# Altium PCB vt18_cpu_board.PcbDoc (part 3 of 7)
Units mil, origin at the board's own origin, x right, y up, seen from the top; angles counter-clockwise.
Board outline 2283.46 x 2244.09 mil, 8 copper layers (Top Layer, GND1, Signal Layer 1, POWER1, POWER2, Signal Layer 2, GND2, Bottom Layer), stack 66.304 mil thick; 339 components, 286 nets, 1965 pads, 1047 vias.
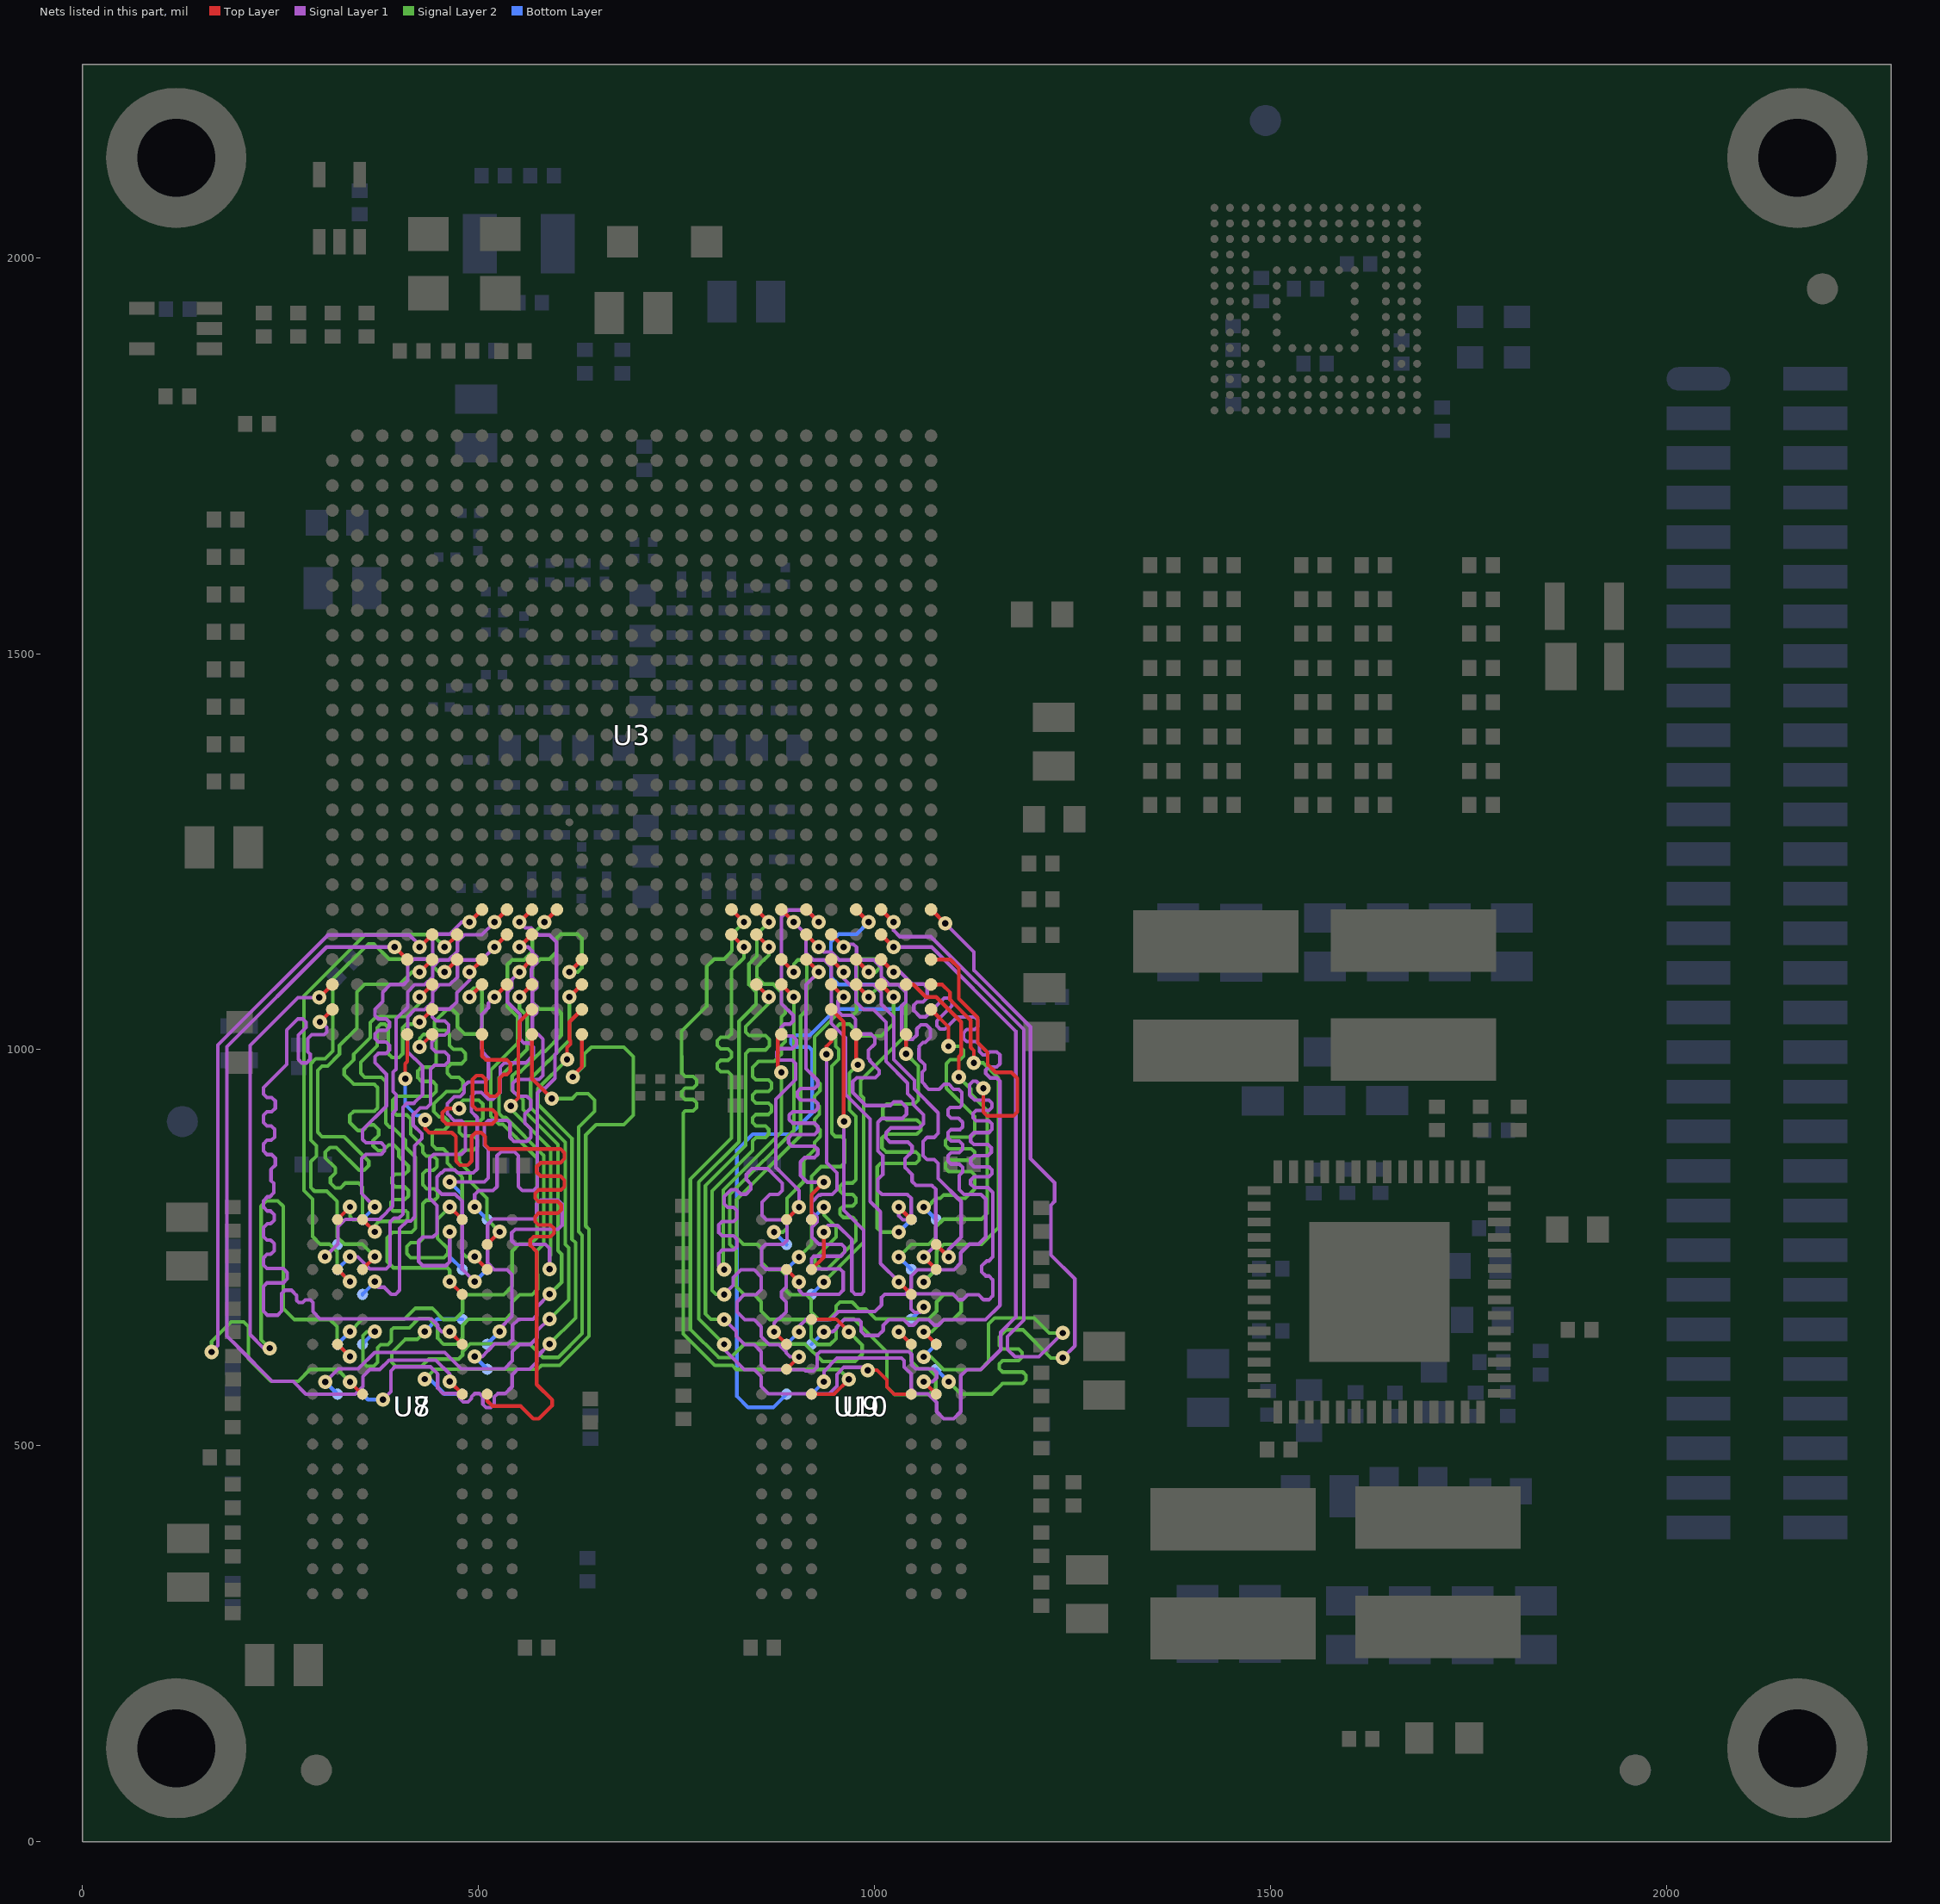
[diagram p9: the nets of this part, all layers, seen from the top]

## Via types
v1: diameter 18, hole 8, Top Layer to Bottom Layer, tented both sides, 718 vias
v2: diameter 20, hole 10, Top Layer to Bottom Layer, tented both sides, 300 vias
v3: diameter 25, hole 15, Top Layer to Bottom Layer, tented both sides, 27 vias
v4: diameter 17.99, hole 7.99, Top Layer to Bottom Layer, tented both sides, 2 vias

## Nets (pads, with @x,y where several pads share a name; then routed paths per layer and width w, separated by ;. In a path a pad name is that pad's centre, name@x,y a point inside that pad or via, vN(x,y) a via of type N, cw(c..) or ccw(c..) an arc to the next point about the centre after c; other vN are vias at no path point) (continued)
DRAM_D3: U3.AA5 U8.H3 | length 1021.2
  Top Layer w4.7: v1(337.73,580.44) 353.08,565.09 U8.H3@353.45,565.1 ; v1(425.66,1129.62) U3.AA5@441.41,1145.37
  Signal Layer 1 w4.5: v1(162.88,618.34) 170.88,626.34 170.88,1005.84 309.93,1144.89 412.83,1144.89 425.66,1132.06 v1(425.66,1129.62)
  Signal Layer 2 w4.5: v1(162.88,618.34) 162.88,631.43 187.79,656.34 203.38,656.34 209.38,650.34 209.38,609.84 237.88,581.34 250.96,581.34 272.37,581.33 287.38,596.34 321.83,596.34 v1(337.73,580.44)
DRAM_D4: U3.AC1 U8.F2 | length 1023.6
  Top Layer w4.7: v1(298.89,1065.84) U3.AC1@315.43,1082.38 ; U8.F2@321.95,628.09 322.14,628.08 v1(337.63,612.58)
  Signal Layer 1 w4.5: v1(236.28,623.19) 228.53,623.19 211.39,640.33 211.39,1005.35 271.88,1065.84 v1(298.89,1065.84)
  Signal Layer 2 w4.5: v1(236.28,623.19) 225.38,634.09 225.38,802.34 232.38,809.34 246.38,809.34 253.38,802.34 253.38,673.34 267.39,659.33 312.45,659.33 321.39,650.4 321.39,628.83 v1(337.63,612.58)
DRAM_D5: U3.AD1 U8.F7 | length 1025.2
  Top Layer w4.7: v1(299.68,1035.14) U3.AD1@315.43,1050.88 ; v1(463.63,644.08) 479.44,628.27 U8.F7@479.43,628.09
  Signal Layer 1 w4.5: v1(299.68,1035.14) 301.36,1035.14 308.38,1028.12 308.38,1022.34 304.93,1018.89 289.43,1018.89 284.43,1013.89 284.43,997.32 287.38,994.37 287.38,987.75 282.97,983.34 276.74,983.34 272.34,987.75 272.34,1018.39 282.15,1028.2 282.15,1034.57 277.83,1038.89 271.96,1038.89 257.83,1024.76 257.83,981.39 228.39,951.94 228.39,944.13 232.89,939.63 238.88,939.63 243.38,935.13 243.38,926.13 238.88,921.63 232.89,921.63 228.39,917.13 228.39,908.13 232.89,903.63 238.38,903.63 242.38,899.63 242.38,889.63 238.38,885.63 232.89,885.63 228.39,881.13 228.39,872.13 232.89,867.63 238.88,867.63 243.38,863.13 243.38,854.13 237.89,848.64 237.89,834.83 241.38,831.34 241.38,819.35 236.37,814.34 233.38,814.34 228.39,809.35 228.39,801.33 233.38,796.34 237.37,796.34 241.89,791.82 241.89,784.84 237.38,780.33 233.39,780.33 228.39,775.33 228.39,764.13 232.89,759.63 237.38,759.63 241.89,755.13 241.89,746.14 237.38,741.63 232.89,741.63 228.39,737.13 228.39,728.13 232.89,723.63 253.38,723.63 258.38,718.63 258.38,710.63 253.38,705.63 232.89,705.63 228.39,701.13 228.39,669.84 233.39,664.84 246.38,664.84 251.38,669.84 251.38,692.34 255.38,696.34 263.8,696.34 270.38,689.76 270.38,683.34 273.02,680.7 278.02,680.7 281.34,684.02 287.7,684.02 290.89,680.83 290.89,669.26 299.82,660.33 440.39,660.33 448.38,652.34 448.38,649.08 453.38,644.08 v1(463.63,644.08)
DRAM_D6: U3.AB4 U8.H7 | length 1027.5
  Top Layer w4.7: v1(394.13,1129.64) U3.AB4@409.9,1113.88 ; v1(463.63,581.09) 479.44,565.28 U8.H7@479.43,565.1
  Signal Layer 1 w4.5: v1(394.13,1129.64) 308.08,1129.64 182.38,1003.94 182.38,638.41 196.13,624.66 196.13,624.59 239.38,581.34 250.96,581.34 263.6,581.33 265.83,581.34 281.98,565.19 344.05,565.19 353.88,575.02 353.88,587.41 362.81,596.34 375.19,596.34 386.95,608.09 445.91,608.09 463.63,590.37 v1(463.63,581.09)
DRAM_D7: U3.AE4 U8.H8 | length 1025.7
  Top Layer w4.7: v1(407.38,963.19) 407.38,982.39 409.92,984.92 U3.AE4@409.92,1019.39 ; v1(432.63,911.34) 432.63,900.34 437.63,895.34 466.38,895.34 471.38,890.34 471.38,859.34 476.38,854.34 486.38,854.34 491.38,859.34 491.38,890.34 496.38,895.34 503.38,895.34 508.38,890.34 508.38,879.79 513.38,874.79 603.38,874.79 608.38,869.79 608.38,862.34 603.38,857.34 578.38,857.34 573.38,852.34 573.38,845.34 578.38,840.34 603.38,840.34 608.38,835.34 608.38,827.22 604.07,822.91 575.69,822.91 571.38,818.61 571.38,812.52 575.69,808.21 600.07,808.21 604.38,803.91 604.38,797.82 600.07,793.51 575.69,793.51 571.38,789.21 571.38,783.12 575.69,778.81 591.07,778.81 595.38,774.51 595.38,768.42 591.07,764.11 569.69,764.11 565.38,759.81 565.38,753.02 573.47,744.93 573.47,577.25 592.84,557.88 592.84,550.8 576.11,534.08 569.04,534.08 553.08,550.04 517.64,550.04 510.94,556.74 U8.H8@510.93,565.1
  Bottom Layer w4.7: v1(407.38,963.19) 407.38,930.99 421.58,916.79 427.18,916.79 v1(432.63,911.34)
DRAM_D8: U3.AD5 U8.D7 | length 648.9
  Top Layer w4.7: v1(425.66,1035.14) U3.AD5@441.41,1050.88 ; v1(463.63,707.07) 479.44,691.26 U8.D7@479.43,691.08
  Signal Layer 2 w4.5: v1(425.66,1035.14) 422.87,1032.34 408.76,1032.34 404.26,1027.84 404.26,994.84 399.76,990.34 390.76,990.34 386.26,994.84 386.26,1027.84 381.76,1032.34 376.38,1032.34 371.92,1027.88 371.92,1004.88 351.38,984.34 351.38,970.34 356.38,965.34 377.3,965.34 382.88,959.76 382.88,907.32 387.88,902.32 391.4,902.32 407.87,885.85 407.87,876.85 420.39,864.33 420.39,774.59 415.39,769.59 391.39,769.59 384.39,762.59 384.39,732.59 392.39,724.59 460.38,724.59 463.63,721.34 v1(463.63,707.07)
DRAM_D9: U3.AE5 U8.A7 | length 653.8
  Top Layer w4.7: v1(425.66,1003.64) U3.AE5@441.41,1019.39 ; v1(463.63,801.56) 479.44,785.75 U8.A7@479.43,785.57
  Signal Layer 2 w4.5: v1(425.66,1003.64) 425.66,1014.34 430.66,1019.34 441.37,1019.34 446.38,1014.33 446.38,982.48 441.88,977.98 427.88,977.98 423.38,973.48 423.38,964.48 427.88,959.98 441.88,959.98 446.38,955.48 446.38,947.34 440.38,941.34 396.38,941.34 391.38,936.34 391.38,922.65 396.38,917.65 409.39,917.65 414.39,912.65 414.39,893.26 429.39,878.26 429.39,870.32 433.89,865.82 442.88,865.82 447.38,861.32 447.38,852.32 442.88,847.82 433.89,847.82 429.39,843.32 429.39,829.59 434.47,824.51 444.14,824.51 448.39,820.26 448.39,814.26 444.14,810.01 433.81,810.01 429.39,805.59 429.39,761.34 424.39,756.34 414.38,756.34 409.38,751.34 409.38,742.59 414.38,737.59 456.39,737.59 461.39,742.59 461.39,748.59 447.89,762.09 447.89,785.82 v1(463.63,801.56)
DRAM_D10: U3.AA6 U8.C2 | length 652.7
  Top Layer w4.7: U8.C2@321.95,722.58 322.14,722.57 v1(337.63,707.07) ; v1(457.16,1129.62) 472.91,1144.87 U3.AA6@472.91,1145.37
  Signal Layer 2 w4.5: 299.82,754.81 290.89,763.75 290.48,764.17 290.48,811.24 279.39,822.33 279.39,1067.91 356.82,1145.34 441.44,1145.34 v1(457.16,1129.62) ; 299.83,754.81 300.06,754.59 311.7,754.59 321.4,744.89 321.4,723.3 v1(337.63,707.07)
DRAM_D11: U3.AE7 U8.B8 | length 653.7
  Top Layer w4.7: v1(475.67,925.64) 459.38,925.64 454.38,920.64 454.38,911.34 459.38,906.34 517.38,906.34 522.38,911.34 522.38,919.34 517.38,924.34 497.38,924.34 492.38,929.34 492.38,962.42 497.34,967.39 504.37,967.39 509.33,962.42 509.33,946.34 514.33,941.34 521.76,941.34 526.46,946.04 526.46,963.84 531.16,968.54 535.68,968.54 540.38,973.24 540.38,982.64 535.68,987.34 509.1,987.34 504.4,992.04 U3.AE7@504.4,1019.39 ; U8.B8@510.93,754.07 510.94,754.38 v1(526.62,770.06)
  Signal Layer 2 w4.5: v1(475.67,925.64) 475.67,931.34 480.67,936.34 500.38,936.34 505.38,931.34 505.38,913.34 500.38,908.34 480.67,908.34 475.67,903.34 475.67,895.68 480.17,891.18 493.88,891.18 498.38,886.68 498.38,877.68 493.88,873.18 480.17,873.18 475.67,868.68 475.67,858.05 489.39,844.33 489.39,833.59 510.39,812.59 510.39,786.3 v1(526.62,770.06)
DRAM_D12: U3.AB5 U8.A2 | length 656.1
  Top Layer w4.7: U8.A2@321.95,785.57 321.96,785.89 v1(337.63,801.56) ; v1(425.66,1098.13) U3.AB5@441.41,1113.88
  Signal Layer 2 w4.5: v1(337.63,801.56) 337.65,789.33 341.67,785.31 348.38,785.31 353.38,790.31 353.38,826.72 348.38,831.72 331.9,831.72 325.63,825.45 319.27,825.45 312.9,831.82 312.9,838.18 319.17,844.45 319.17,850.81 306.39,863.59 306.39,870.59 312.39,876.59 320.39,876.59 349.39,847.59 355.39,847.59 361.39,853.59 361.39,859.33 330.38,890.34 302.38,890.34 296.88,895.84 296.88,973.84 302.38,979.34 309.35,979.34 324.42,994.41 324.42,1005.38 346.42,1027.38 346.42,1072.95 355.97,1082.5 400.49,1082.5 416.12,1098.13 v1(425.66,1098.13)
DRAM_D13: U3.AC5 U8.A3 | length 648.4
  Top Layer w4.7: U8.A3@353.45,785.57 353.63,785.56 v1(369.13,770.06) ; v1(425.66,1066.63) U3.AC5@441.41,1082.38
  Signal Layer 2 w4.5: v1(369.13,770.06) 369.13,778.34 374.13,783.34 407.38,783.34 410.38,786.34 410.38,794.34 408.38,796.34 392.38,796.34 389.38,799.34 389.38,807.34 392.88,810.84 406.88,810.84 411.38,815.34 411.38,822.34 406.88,826.84 394.88,826.84 390.38,831.34 390.38,838.34 394.88,842.84 406.88,842.84 411.38,847.34 411.38,853.34 399.37,865.35 399.37,873.35 393.01,879.71 386.64,879.71 379.51,872.58 373.14,872.58 366.78,878.94 366.78,885.3 373.92,892.44 373.92,898.8 367.55,905.17 361.19,905.17 354.05,898.03 347.69,898.03 337.38,908.34 337.38,917.34 342.38,922.34 368.38,922.34 372.38,926.34 372.38,952.34 368.38,956.34 342.38,956.34 330.38,968.34 330.38,975.34 342.38,987.34 342.38,994.34 363.42,1015.38 363.42,1034.38 370.88,1041.84 408.88,1041.84 425.66,1058.62 v1(425.66,1066.63)
DRAM_D14: U3.AB6 U8.C3 | length 649.6
  Top Layer w4.7: U8.C3@353.45,722.58 353.46,722.9 v1(369.13,738.57) ; v1(457.16,1098.13) U3.AB6@472.91,1113.88
  Signal Layer 2 w4.5: 314.93,997.32 306,988.39 294.43,988.39 288.38,982.34 288.38,885.84 295.33,878.89 295.33,865.84 288.38,858.89 288.38,825.84 292.83,821.39 308.33,821.39 321.33,808.39 321.33,807.93 321.39,807.88 321.39,763.59 330.39,754.59 331.41,754.59 331.46,754.54 344.1,754.54 344.15,754.59 353.1,754.59 v1(369.13,738.57) ; 314.93,997.35 315.92,998.34 315.92,1088.88 360.93,1133.89 367.83,1133.89 387.35,1114.37 433.35,1114.37 449.59,1098.13 v1(457.16,1098.13)
DRAM_D15: U3.AC7 U8.C8 | length 649.9
  Top Layer w4.7: v1(488.66,1066.63) U3.AC7@504.4,1082.38 ; v1(495.13,738.57) 510.94,722.76 U8.C8@510.93,722.58
  Signal Layer 2 w4.5: v1(488.66,1066.63) 488.66,1072.88 493.66,1077.88 499.98,1077.88 504.38,1073.48 504.38,1024.88 499.38,1019.88 482.34,1019.88 473.38,1028.84 473.38,1044.38 466.92,1050.84 459.84,1050.84 444.41,1035.41 444.41,1028.34 448.4,1024.34 458.38,1024.34 463.38,1019.34 463.38,1005.34 468.38,1000.34 478.38,1000.34 483.38,995.34 483.38,987.34 478.38,982.34 465.38,982.34 460.38,977.34 460.38,970.34 465.38,965.34 475.38,965.34 480.38,960.34 480.38,952.34 475.38,947.34 459.4,947.34 443.38,931.32 443.38,922.16 450.38,915.16 456.45,915.16 461.38,910.23 461.38,903.27 456.45,898.34 446.38,898.34 441.38,893.34 441.38,879.71 446.38,874.71 455.38,874.71 460.38,869.71 460.38,856.84 468.91,848.31 469.95,848.31 478.88,839.38 478.88,838.34 479.39,837.83 479.39,743.57 484.39,738.57 v1(495.13,738.57)
DRAM_D16: U3.AB7 U7.D7 | length 612
  Top Layer w4.7: v1(488.66,1098.13) 504.4,1113.36 U3.AB7@504.4,1113.88
  Signal Layer 1 w4.5: v1(369.13,707.07) 369.13,704.34 373.38,700.09 380.91,700.09 389.66,691.34 395.38,691.34 400.38,696.34 400.38,774.34 409.78,783.74 414.38,783.74 419.38,788.74 419.38,878.87 428.38,887.87 428.38,894.02 417.38,905.02 417.38,917.66 426.31,926.59 434.38,926.59 439.38,931.59 439.38,975.34 444.38,980.34 457.38,980.34 462.38,985.34 462.38,992.34 457.38,997.34 445.91,997.34 440.91,1002.34 440.91,1009.96 449.3,1018.34 457.38,1018.34 462.38,1023.34 462.38,1031.34 457.38,1036.34 446.38,1036.34 441.38,1041.34 441.38,1046.38 446.38,1051.38 463.48,1051.38 472.41,1060.31 472.41,1071.95 488.66,1088.2 v1(488.66,1098.13)
  Bottom Layer w4.7: U7.D7@353.46,691.08 353.46,691.24 353.38,691.32 v1(369.13,707.07)
DRAM_D17: U3.AA8 U7.C8 | length 613.7
  Top Layer w4.7: v1(520.15,1129.62) U3.AA8@535.9,1145.37
  Signal Layer 1 w4.5: v1(337.63,738.57) 347.56,738.57 362.81,723.32 383.38,723.32 388.38,728.32 388.38,782.31 393.38,787.31 399.41,787.31 404.41,792.31 404.41,927.34 409.41,932.34 418.38,932.34 429.38,943.34 429.38,978.72 419.72,988.39 419.34,988.39 410.41,997.32 410.41,1041.46 419.34,1050.39 432,1050.39 441.91,1060.31 441.91,1072.95 450.84,1081.88 463.48,1081.88 473.41,1091.81 473.41,1107.34 479.44,1113.38 503.91,1113.38 v1(520.15,1129.62)
  Bottom Layer w4.7: U7.C8@321.96,722.58 321.96,722.9 v1(337.63,738.57)
DRAM_D18: U3.AB9 U7.C2 | length 615.6
  Top Layer w4.7: v1(551.65,1098.13) 566.92,1113.88 U3.AB9@567.4,1113.88
  Signal Layer 1 w4.5: v1(495.13,707.07) 479.39,722.81 479.39,808.59 470.39,817.59 453.39,817.59 447.39,823.59 447.39,839.34 452.39,844.34 453.35,844.34 457.31,848.31 469.95,848.31 473.92,844.34 493.38,844.34 498.38,849.34 498.38,914.32 490.92,921.78 490.92,941.34 495.92,946.34 503.38,946.34 512.38,937.34 518.38,937.34 527.38,946.34 527.38,978.34 532.38,983.34 559.38,983.34 569.38,993.34 569.38,1003.34 564.38,1008.34 557.38,1008.34 552.38,1013.34 552.38,1044.33 536.4,1060.31 536.4,1072.95 541.78,1078.33 541.78,1088.26 v1(551.65,1098.13)
  Bottom Layer w4.7: v1(495.13,707.07) 510.79,722.73 510.88,722.82 510.94,722.76 U7.C2@510.94,722.58
DRAM_D19: U3.Y9 U7.A2 | length 608.1
  Top Layer w4.7: v1(551.65,1161.12) U3.Y9@567.4,1176.87
  Signal Layer 1 w4.5: v1(495.13,801.56) 495.13,817.33 500.13,822.33 518.38,822.33 523.38,827.33 523.38,866.34 528.38,871.34 545.38,871.34 550.38,866.34 550.38,827.33 555.38,822.33 569.38,822.33 574.38,827.33 574.38,945.34 580.38,951.34 584.01,951.34 596.48,963.81 596.48,993.91 598.39,995.82 598.39,1135.94 589.46,1144.87 575.75,1144.87 566.73,1153.89 558.88,1153.89 v1(551.65,1161.12)
  Bottom Layer w4.7: v1(495.13,801.56) 510.94,785.75 U7.A2@510.94,785.57
DRAM_D20: U3.Y7 U7.A7 | length 614
  Top Layer w4.7: v1(488.66,1161.12) U3.Y7@504.4,1176.87
  Signal Layer 1 w4.5: 359.05,811.64 v1(369.13,801.56) ; 359.05,811.66 352.38,818.32 352.38,862.66 357.64,867.91 377.13,867.91 381.38,872.16 381.38,878.16 377.13,882.41 357.64,882.41 353.39,886.66 353.39,898.75 383.63,928.99 383.63,969.09 369.13,983.59 369.13,991.09 373.38,995.34 383.16,995.34 387.41,999.58 387.41,1005.59 383.16,1009.84 373.38,1009.84 369.13,1014.08 369.13,1020.09 373.38,1024.34 383.16,1024.34 387.41,1028.58 387.41,1034.59 383.16,1038.84 373.38,1038.84 369.13,1043.08 369.13,1051.09 378.92,1060.88 378.92,1072.56 ; 378.93,1072.58 387.86,1081.51 388.7,1082.34 405.41,1082.34 410.41,1087.34 410.41,1106.4 418.38,1114.37 436.91,1114.37 441.91,1119.37 441.91,1138.87 448.91,1145.87 463.48,1145.87 478.73,1161.12 v1(488.66,1161.12)
  Bottom Layer w4.7: U7.A7@353.46,785.57 353.46,785.89 v1(369.13,801.56)
DRAM_D21: U3.Y8 U7.B8 | length 611.5
  Top Layer w4.7: v1(520.15,1161.12) U3.Y8@535.9,1176.87
  Signal Layer 1 w4.5: v1(306.14,738.57) 322.38,754.81 322.38,776.34 331.93,785.89 374.93,785.89 375.35,786.31 375.45,786.31 384.38,795.24 384.38,795.34 391.38,802.34 391.38,919.79 395.91,924.32 395.91,943.56 392.13,947.34 392.13,971.51 395.91,975.29 395.91,1038.97 401.91,1044.97 410.41,1053.49 410.41,1072.95 419.34,1081.88 431.98,1081.88 441.91,1091.81 441.91,1104.45 450.84,1113.38 462.42,1113.38 463.41,1114.37 463.48,1114.37 472.41,1123.3 472.41,1123.37 473.41,1124.37 473.41,1136.37 482.23,1145.19 504.22,1145.19 v1(520.15,1161.12)
  Bottom Layer w4.7: v1(306.14,738.57) 321.79,754.24 321.88,754.32 321.96,754.24 U7.B8@321.96,754.07
DRAM_D22: U3.AC8 U7.C3 | length 615.2
  Top Layer w4.7: v1(520.15,1066.63) U3.AC8@535.9,1082.38
  Signal Layer 1 w4.5: v1(463.63,770.06) 463.63,732.34 458.63,727.34 429.38,727.34 424.38,732.34 424.38,758.35 429.38,763.35 442.38,763.35 447.38,768.35 447.38,803.34 438.39,812.33 438.39,862.99 443.39,867.99 478.38,867.99 483.38,872.99 483.38,905.39 478.38,910.39 469.35,910.39 460.42,919.32 460.42,931.96 469.35,940.89 476.91,940.89 481.91,945.89 481.91,954.34 486.91,959.34 507.41,959.34 512.41,964.34 512.41,989.81 504.9,997.32 504.9,999.83 503.38,1001.35 503.38,1028.29 503.91,1028.82 503.91,1044.49 512.41,1052.99 512.41,1058.88 v1(520.15,1066.63)
  Bottom Layer w4.7: v1(463.63,770.06) 463.63,738.57 479.44,722.76 U7.C3@479.44,722.58
DRAM_D23: U3.AA9 U7.A3 | length 608.9
  Top Layer w4.7: v1(551.65,1129.62) U3.AA9@567.4,1145.37
  Signal Layer 1 w4.5: v1(463.63,833.06) 507.38,833.06 512.38,838.06 512.38,874.36 507.38,879.36 507.38,905.8 512.38,910.8 536.38,910.8 539.63,907.55 539.63,889.34 544.63,884.34 560.88,884.34 565.88,889.34 565.88,899.84 558.38,907.34 558.38,918.84 565.88,926.34 565.88,936.34 560.88,941.34 550.05,941.34 543.38,948.01 543.38,957.34 548.38,962.34 576.38,962.34 581.38,967.34 581.38,1013.34 567.89,1026.83 567.89,1041.46 573.38,1046.95 573.38,1054.34 567.89,1059.83 567.89,1072.95 573.38,1078.44 573.38,1085.26 566.9,1091.74 566.9,1101.97 567.89,1102.96 567.89,1104.45 573.38,1109.94 573.38,1117.33 567.89,1122.82 567.89,1124.62 562.89,1129.62 v1(551.65,1129.62)
  Bottom Layer w4.7: v1(463.63,833.06) 479.38,817.31 479.38,785.81 479.44,785.75 U7.A3@479.44,785.57
DRAM_D24: U3.AE9 U7.E3 | length 851.1
  Top Layer w4.7: U3.AE9@567.4,1019.39 567.4,963.42 v1(592.53,938.29)
  Signal Layer 2 w4.5: v1(432.14,644.08) 422.38,634.34 407.38,634.34 390.38,617.34 390.38,605.34 395.38,600.34 428.14,600.34 437.14,609.34 474.88,609.34 479.88,614.34 479.88,618.9 489.57,628.59 564.39,628.59 581.39,611.59 600.6,611.59 630.88,641.87 630.88,765.84 626.38,770.34 626.38,902.34 646.38,922.34 646.38,936.34 638.38,944.34 624.38,944.34 618.33,938.29 v1(592.53,938.29)
  Bottom Layer w4.7: v1(432.14,644.08) 447.88,659.83 475.38,659.83 475.63,659.58 U7.E3@479.44,659.59
DRAM_D25: U3.Y10 U7.F8 | length 850.4
  Top Layer w4.7: v1(583.14,1161.12) U3.Y10@598.89,1176.87
  Signal Layer 2 w4.5: v1(337.63,644.08) 353.14,659.59 406.39,659.59 420.39,673.59 441.39,673.59 455.65,659.33 469.95,659.33 470.04,659.24 479.88,669.08 479.88,685.08 485.62,690.83 531.95,690.83 542.39,701.27 542.39,745.59 551.39,754.59 565.39,754.59 573.89,763.09 573.89,862.91 546.67,890.12 530.7,906.09 525.65,906.09 515.38,916.36 515.38,974.34 549.38,1008.34 549.38,1041.34 536.4,1054.32 536.4,1107.34 542.43,1113.38 557.42,1113.38 567.89,1123.85 567.89,1145.1 583.14,1160.35 v1(583.14,1161.12)
  Bottom Layer w4.7: U7.F8@321.96,628.09 321.96,628.25 321.88,628.33 v1(337.63,644.08)
DRAM_D26: U3.AE11 U7.H3 | length 848.6
  Top Layer w4.7: v1(619.03,965.69) 619.03,966.99 630.39,978.35 U3.AE11@630.39,1019.39
  Signal Layer 2 w4.5: v1(432.14,584.09) 444.64,596.59 574.39,596.59 579.39,601.59 602.63,601.59 639.38,638.34 639.38,773.34 635.38,777.34 635.38,892.34 648.38,905.34 683.38,905.34 695.38,917.34 695.38,991.34 683.38,1003.34 642.38,1003.34 633.38,994.34 633.38,980.04 v1(619.03,965.69)
  Bottom Layer w4.7: v1(432.14,584.09) 438.63,584.09 457.38,565.34 468.38,565.34 468.63,565.09 U7.H3@479.44,565.1
DRAM_D27: U3.AB11 U7.G2 | length 842.8
  Top Layer w4.7: v1(614.64,1098.13) U3.AB11@630.39,1113.88
  Signal Layer 1 w4.5: v1(495.13,612.58) 504.38,612.58 511.89,620.09 520.41,628.59 537.87,628.59 542.87,633.59 542.87,652.04 550.16,659.33 552.13,659.33 552.39,659.59 568.63,659.59 573.39,664.35 573.39,675.09 v1(589.62,691.32)
  Signal Layer 2 w4.5: v1(589.62,691.32) 604.87,706.57 604.87,741.85 600.38,746.34 600.38,880.17 556.18,924.37 556.18,936.75 551.18,941.75 549.64,941.75 542.38,949.01 542.38,966.6 547.38,971.6 552.67,971.6 569.88,988.81 579.06,998.02 584.06,998.02 604.38,1018.34 604.38,1046.34 599.38,1051.34 576.86,1051.34 567.89,1060.31 567.89,1104.45 577.81,1114.37 589.46,1114.37 598.39,1123.3 598.39,1140.87 603.39,1145.87 625.38,1145.87 630.38,1140.87 630.38,1103.13 625.38,1098.13 v1(614.64,1098.13)
  Bottom Layer w4.7: v1(495.13,612.58) 510.94,596.77 U7.G2@510.94,596.59
DRAM_D28: U3.AC9 U7.F7 | length 847
  Top Layer w4.7: v1(551.65,1066.63) U3.AC9@567.4,1082.38
  Signal Layer 2 w4.5: v1(369.13,644.08) 358.88,644.08 353.9,639.1 353.9,605.34 358.9,600.34 367.39,600.34 372.39,605.34 372.39,623.59 376.39,627.59 385.39,627.59 389.97,632.17 389.97,646.34 392.45,648.83 412.63,648.83 424.39,660.59 437.39,660.59 448.38,649.6 448.38,635.6 455.89,628.09 471.89,628.09 479.88,636.08 479.88,652.08 487.39,659.59 534.39,659.59 542.39,667.59 542.39,681.41 551.8,690.83 567.62,690.83 574.39,697.59 574.39,716.48 ; v1(551.65,1066.63) 551.65,1052.33 561.38,1042.6 561.38,1000.34 525.68,964.64 525.68,919.76 525.86,919.59 530.86,914.59 534.24,914.59 582.39,866.44 582.39,754.59 574.37,746.57 574.37,716.5
  Bottom Layer w4.7: U7.F7@353.46,628.09 353.46,628.25 353.38,628.33 v1(369.13,644.08)
DRAM_D29: U3.AD9 U7.F2 | length 848
  Top Layer w4.7: v1(540.93,928.89) 540.93,929.89 550.25,939.21 550.25,1011.46 551.65,1012.86 551.65,1035.41 567.12,1050.88 U3.AD9@567.4,1050.88
  Signal Layer 1 w4.5: 511.37,732.25 511.37,744.89 ; 511.37,763.75 511.37,776.38 ; 511.38,732.24 511.38,730.66 519.7,722.34 536.12,722.34 542.14,716.32 542.14,663.34 526.62,647.83 v1(526.62,644.08) ; 511.38,744.89 511.38,763.74 ; 511.38,776.39 511.38,779.34 518.35,786.31 570.38,786.31 573.37,789.3 573.37,805.34 578.37,810.34 600.38,810.34 605.38,805.34 605.38,778.34 600.38,773.34 546.38,773.34 541.87,768.83 541.87,758.85 546.38,754.34 584.62,754.34 589.62,749.34 v1(589.62,722.82)
  Signal Layer 2 w4.5: v1(540.93,928.89) 540.93,924.79 590.89,874.83 590.89,740.35 589.62,739.08 v1(589.62,722.82)
  Bottom Layer w4.7: U7.F2@510.94,628.09 510.94,628.27 510.88,628.33 v1(526.62,644.08)
DRAM_D30: U3.AD11 U7.H7 | length 850.2
  Top Layer w4.7: v1(611.73,987.59) 611.73,1002.79 616.04,1007.1 616.04,1011.46 614.64,1012.86 614.64,1035.14 U3.AD11@630.39,1050.88
  Signal Layer 1 w4.5: v1(379.38,558.34) 389.38,568.34 389.38,594.59 394.38,599.59 439.18,599.59 448.38,590.39 448.38,572.58 455.13,565.84 472.12,565.84 476.37,561.59 476.37,559.59 480.62,555.34 486.62,555.34 490.87,559.59 490.87,561.59 495.12,565.84 501.12,565.84 505.37,561.59 505.37,552.59 509.62,548.34 515.62,548.34 519.87,552.59 519.87,561.59 524.12,565.84 533.62,565.84 542.37,574.59 542.37,589.59 549.37,596.59 564.37,596.59 573.25,605.47 573.25,606.14 573.37,606.27 573.37,612.1 v1(589.6,628.33)
  Signal Layer 2 w4.5: v1(589.6,628.33) 589.6,628.56 622.38,661.34 622.38,756.34 617.88,760.84 617.88,887.84 574.98,930.74 574.98,950.84 v1(611.73,987.59)
  Bottom Layer w4.7: U7.H7@353.46,565.1 360.21,558.34 v1(379.38,558.34)
DRAM_D31: U3.AC11 U7.H8 | length 846.8
  Top Layer w4.7: v1(614.64,1066.63) U3.AC11@630.39,1082.38
  Signal Layer 1 w4.5: v1(306.28,580.74) 306.78,580.74 323.13,597.09 348.13,597.09 368.93,617.89 457.28,617.89 477.84,597.33 532.94,597.33 542.85,607.25 542.85,618.9 551.79,627.83 565.61,627.83 574.37,636.59 574.37,645.33 588.87,659.83 v1(589.6,659.83)
  Signal Layer 2 w4.5: v1(589.6,659.83) 613.88,684.11 613.88,749.84 609.38,754.34 609.38,883.2 565.83,926.75 565.83,963.84 587.58,985.59 588.16,985.59 614.64,1012.07 v1(614.64,1066.63)
  Bottom Layer w4.7: v1(306.28,580.74) 317.43,569.59 U7.H8@321.96,565.1
DRAM_D32: U3.AA17 U10.E3 | length 925.7
  Top Layer w4.7: U3.AA17@819.36,1145.37 v1(835.11,1129.62) ; U10.E3@920.38,659.59 951.88,659.58 v1(967.63,643.83)
  Signal Layer 2 w4.5: v1(835.11,1129.62) 835.11,1116.07 819.38,1100.34 819.38,1019.88 815.13,1015.64 805.63,1015.64 801.38,1011.39 801.38,1005.38 805.63,1001.14 815.13,1001.14 819.38,996.89 819.38,990.88 815.13,986.64 805.63,986.64 801.38,982.39 801.38,976.38 805.63,972.14 815.13,972.14 819.38,967.89 819.38,888.34 767.38,836.34 767.38,647.34 803.38,611.34 818.38,611.34 835.38,628.34 912.38,628.34 934.38,606.34 975.38,606.34 984.38,615.34 984.38,627.08 v1(967.63,643.83)
DRAM_D33: U3.AA18 U10.G2 | length 930.2
  Top Layer w4.7: U3.AA18@850.86,1145.37 v1(866.61,1129.62) ; U10.G2@888.88,596.59 v1(904.64,612.33)
  Signal Layer 1 w4.5: v1(810.15,691.07) 821.64,702.56 821.64,712.49 831.22,722.07 847.97,722.07 856.9,713.14 856.9,697.34 850.13,690.57 835.33,690.57 826.4,681.64 826.4,669.01 836.32,659.08 847.97,659.08 856.9,650.15 856.9,637.82 867.14,627.58 879.46,627.58 888.39,618.65 888.39,617.33 893.39,612.33 v1(904.64,612.33)
  Signal Layer 2 w4.5: v1(810.15,691.07) 799.9,691.07 794.9,696.07 794.9,821.86 845.88,872.84 845.88,884.98 850.13,889.23 862.13,889.23 866.38,893.48 866.38,899.48 862.13,903.73 850.13,903.73 845.88,907.98 845.88,913.98 850.13,918.23 866.13,918.23 869.86,921.95 869.86,929.01 866.13,932.73 850.13,932.73 845.88,936.98 845.88,942.98 850.13,947.23 866.13,947.23 869.86,950.95 869.86,958.01 866.13,961.73 850.13,961.73 845.88,965.98 845.88,977.84 853.38,985.34 873.38,985.34 882.38,994.34 882.38,1005.18 887.38,1010.18 887.38,1023.18 882.38,1028.18 882.38,1041.18 887.38,1046.18 887.38,1053.34 882.38,1058.34 882.38,1072.43 871.93,1082.88 860.29,1082.88 851.36,1091.81 851.36,1104.45 860.29,1113.38 860.42,1113.38 866.61,1119.57 v1(866.61,1129.62)
DRAM_D34: U3.AC18 U10.H8 | length 925.1
  Top Layer w4.7: U3.AC18@850.86,1082.38 v1(866.61,1066.63) ; v1(1062.12,580.84) U10.H8@1077.86,565.1
  Signal Layer 1 w4.5: v1(810.15,659.58) 825.38,644.35 825.38,638.34 836.14,627.58 847.97,627.58 856.9,618.65 856.9,601.84 862.66,596.09 910.96,596.09 912.7,594.34 922.64,594.34 927.64,599.34 927.64,615.34 931.38,619.08 1043.13,619.08 1046.87,615.34 1046.87,602.34 1052.13,597.08 1073.63,597.08 1078.37,592.34 1078.37,585.84 1073.37,580.84 v1(1062.12,580.84)
  Signal Layer 2 w4.5: v1(810.15,659.58) 793.38,659.58 786.4,666.55 786.4,828.36 837.38,879.34 837.38,995.23 841.88,999.73 862.38,999.73 867.38,1004.73 867.38,1012.73 862.38,1017.73 841.88,1017.73 837.38,1022.23 837.38,1029.34 866.61,1058.57 v1(866.61,1066.63)
DRAM_D35: U3.AE19 U10.F2 | length 927.9
  Top Layer w4.7: v1(873.14,643.83) U10.F2@888.88,628.09 ; v1(882.36,971.32) 877.83,975.84 877.83,1014.86 U3.AE19@882.36,1019.39
  Signal Layer 1 w4.5: v1(810.15,722.57) 807.38,722.57 803.38,726.57 803.38,743.03 807.38,747.03 821.88,747.03 826.38,751.53 826.38,760.53 821.88,765.03 807.38,765.03 803.38,769.03 803.38,779.03 807.38,783.03 821.88,783.03 826.38,787.53 826.38,796.53 821.88,801.03 814.65,801.03 810.15,805.53 810.15,814.56 819.05,823.46 825.38,823.46 831.26,817.58 837.63,817.58 843.99,823.95 843.99,830.31 838.11,836.19 838.11,842.52 845.43,849.84 864.86,849.84 883.39,831.3 883.39,822.34 878.39,817.34 867.61,817.34 857.89,807.63 857.89,790.55 863.38,785.06 884.38,785.06 889.38,780.06 889.38,759.34 884.38,754.34 862.38,754.34 857.38,749.34 857.38,728.07 862.38,723.07 883.39,723.07 888.39,718.07 888.39,700.5 882.38,694.49 882.38,687.66 888.39,681.64 888.39,669.01 879.46,660.07 878.14,660.07 873.14,655.07 v1(873.14,643.83)
  Signal Layer 2 w4.5: v1(810.15,722.57) 808.88,723.84 808.88,822.84 882.36,896.32 v1(882.36,971.32)
DRAM_D36: U3.Y17 U10.H3 | length 924.5
  Top Layer w4.7: U3.Y17@819.36,1176.87 v1(835.11,1161.12) ; U10.H3@920.38,565.1 948.88,565.09 v1(967.63,583.84)
  Signal Layer 2 w4.5: 809.37,1114.34 797.38,1114.34 788.04,1105 788.04,1055 756.38,1023.34 756.38,992.32 756.63,992.07 756.63,970.4 760.88,966.15 771.13,966.15 775.38,961.9 775.38,955.9 771.13,951.65 760.88,951.65 756.63,947.4 756.63,941.4 760.88,937.15 771.13,937.15 775.38,932.9 775.38,926.9 771.13,922.65 760.88,922.65 758.38,920.15 758.38,641.34 798.38,601.34 820.38,601.34 825.38,596.34 955.13,596.34 v1(967.63,583.84) ; 809.4,1114.37 809.94,1114.37 818.87,1123.3 818.87,1123.83 819.86,1124.82 819.86,1145.87 v1(835.11,1161.12)
DRAM_D37: U3.Y18 U10.H7 | length 927.5
  Top Layer w4.5: v1(991.38,595.33) 1003.09,595.33 1015.43,583 1015.43,574.42
  Top Layer w4.7: U3.Y18@850.86,1176.87 v1(866.61,1161.12) ; 1015.59,574.27 1024.76,565.1 U10.H7@1046.36,565.1
  Signal Layer 1 w4.5: v1(810.15,628.08) 810.15,621.57 835.63,596.09 847.97,596.09 856.9,587.15 856.9,574.82 866.13,565.59 942.63,565.59 952.38,575.34 952.38,590.15 961.31,599.09 987.63,599.09 v1(991.38,595.33)
  Signal Layer 2 w4.5: v1(810.15,628.08) 777.9,660.33 777.9,832.86 828.88,883.84 828.88,1035.86 850.38,1057.36 850.38,1071.52 ; 841.38,1081.88 841.38,1108.34 851.36,1118.32 851.36,1135.94 ; 841.43,1081.88 850.36,1072.95 850.36,1071.54 ; 851.38,1135.96 851.38,1145.89 v1(866.61,1161.12)
DRAM_D38: U3.AB19 U10.F8 | length 930.4
  Top Layer w4.7: U3.AB19@882.36,1113.88 v1(898.1,1098.13) ; v1(1062.12,643.83) U10.F8@1077.86,628.09
  Signal Layer 2 w4.5: v1(898.1,1098.13) 898.1,1108.34 903.1,1113.34 909.38,1113.34 914.38,1108.34 914.38,1104.48 914.35,1104.44 914.35,1091.81 ; 914.35,1060.31 914.35,1072.95 ; 914.38,1060.28 914.38,1050.34 906.6,1042.56 906.6,891.56 825.88,810.84 825.88,762.84 834.38,754.34 852.38,754.34 857.38,749.34 857.38,731.34 866.65,722.07 881.38,722.07 888.39,715.06 888.39,695.57 893.39,690.57 914.15,690.57 919.89,684.83 919.89,668.83 929.64,659.08 941.46,659.08 951.39,669.01 951.39,676.34 956.39,681.34 971.86,681.34 980.36,672.84 988.88,672.84 1001.65,660.07 1068.43,660.07 1078.37,670.01 1078.37,681.64 1087.3,690.57 1099.93,690.57 1109.38,681.13 1109.38,669.52 1098.94,659.08 1087.3,659.08 1072.05,643.83 v1(1062.12,643.83) ; 914.38,1072.98 914.38,1091.78
DRAM_D39: U3.AC19 U10.F7 | length 933.3
  Top Layer w4.7: U3.AC19@882.36,1082.38 v1(898.1,1066.63) ; v1(1030.62,643.83) U10.F7@1046.36,628.09
  Signal Layer 2 w4.5: 850.47,850.43 817.38,817.34 817.38,754.34 825.4,746.32 825.4,701.02 835.84,690.57 847.97,690.57 856.9,681.64 856.9,670 867.55,659.34 ; 850.49,850.43 870.88,870.82 898.1,898.06 v1(898.1,1066.63) ; 867.59,659.38 867.62,659.34 912.38,659.34 919.89,651.83 919.89,635.83 927.88,627.84 943.88,627.84 951.39,635.35 951.39,649.35 962.38,660.34 973.58,660.34 1015.44,618.48 1015.44,587 1015.55,586.89 1015.55,574.45 1025.4,564.59 1068.63,564.59 1077.38,573.34 1077.38,588.14 1068.44,597.08 1055.8,597.08 1045.87,607.01 1045.87,628.58 v1(1030.62,643.83)
DRAM_D40: U3.Y19 U10.D7 | length 561.9
  Top Layer w4.7: U3.Y19@882.36,1176.87 v1(898.1,1161.12) ; v1(1030.62,706.82) U10.D7@1046.36,691.08
  Signal Layer 1 w4.5: v1(898.1,1161.12) 913.38,1145.84 913.38,1122.34 922.34,1113.38 936.34,1113.38 945.38,1104.34 945.38,1033.34 963.38,1015.34 963.38,943.34 994.38,912.34 994.38,808.34 1007.38,795.34 1007.38,730.06 v1(1030.62,706.82)
DRAM_D41: U3.AB20 U10.A3 | length 563.5
  Top Layer w4.7: U3.AB20@913.85,1113.88 v1(929.6,1098.13) ; U10.A3@920.38,785.57 920.39,817.06 v1(936.14,832.8)
  Signal Layer 1 w4.5: v1(929.6,1098.13) 913.38,1081.91 913.38,976.11 928.38,961.11 928.38,955.11 924.13,950.86 906.6,950.86 902.35,946.61 902.35,940.61 906.6,936.36 924.13,936.36 928.38,932.11 928.38,926.11 924.13,921.86 896.63,921.86 892.38,917.61 892.38,911.61 896.63,907.36 924.13,907.36 928.38,903.11 928.38,897.11 924.13,892.86 895.63,892.86 891.38,888.61 891.38,882.61 895.63,878.36 924.13,878.36 928.38,874.11 928.38,868.11 924.13,863.86 911.9,863.86 906.38,858.34 906.38,841.34 914.92,832.8 v1(936.14,832.8)
DRAM_D42: U3.AB21 U10.C8 | length 559.1
  Top Layer w4.7: U3.AB21@945.35,1113.88 v1(961.1,1098.13) ; v1(1062.12,738.32) U10.C8@1077.86,722.58
  Signal Layer 1 w4.5: v1(961.1,1098.13) 961.1,1089.62 976.38,1074.34 976.38,1060.34 986.33,1050.39 998.91,1050.39 1014.38,1034.92 1014.38,985.33 1041.88,957.83 1041.88,944.34 1048.88,937.34 1048.88,930.84 1061.7,918.02 1061.7,906.66 1056.38,901.34 1020.38,901.34 1014.38,895.34 1014.38,888.34 1019.38,883.34 1042.38,883.34 1047.38,878.34 1047.38,871.34 1038.38,862.34 1038.38,851.34 1047.38,842.34 1047.38,833.84 1052.38,828.84 1072.38,828.84 1077.38,823.84 1077.38,753.58 v1(1062.12,738.32)
DRAM_D43: U3.AD21 U10.C3 | length 558.5
  Top Layer w4.7: U10.C3@920.38,722.58 936.14,738.32 v1(936.14,769.81) ; U3.AD21@945.35,1050.88 961.1,1035.14 961.1,909.62 v1(961.38,909.34)
  Signal Layer 1 w4.5: v1(936.14,769.81) 936.14,773.34 941.14,778.34 953.38,778.34 971.38,760.34 971.38,695.34 975.38,691.34 983.38,691.34 986.38,694.34 986.38,772.34 961.38,797.34 v1(961.38,909.34)
DRAM_D44: U3.Y20 U10.A2 | length 560.1
  Top Layer w4.7: U10.A2@888.88,785.57 v1(904.64,801.31) ; U3.Y20@913.85,1176.87 v1(929.6,1161.12)
  Signal Layer 1 w4.5: v1(904.64,801.31) 904.64,822.08 875.38,851.34 875.38,937.34 900.38,962.34 900.38,982.57 896.13,986.81 880.63,986.81 876.38,991.06 876.38,997.07 880.63,1001.31 896.13,1001.31 901.38,1006.56 901.38,1012.34 896.38,1017.34 885.38,1017.34 882.06,1020.66 882.06,1028.02 886.38,1032.34 893.38,1032.34 897.38,1036.34 897.38,1043.34 882.38,1058.34 882.38,1167.67 891.08,1176.37 914.35,1176.37 v1(929.6,1161.12)
DRAM_D45: U3.AA20 U10.B8 | length 566.3
  Top Layer w4.7: U3.AA20@913.85,1145.37 v1(929.6,1129.62) ; U10.B8@1077.86,754.07 v1(1093.62,738.32)
  Signal Layer 1 w4.5: v1(929.6,1129.62) 935.88,1123.34 945.38,1123.34 955.34,1113.38 971.35,1113.38 976.38,1108.35 976.38,1090.34 984.84,1081.88 998.91,1081.88 1008.38,1072.41 1008.38,1057.34 1024.38,1041.34 1024.38,987.36 1050.38,961.36 1050.38,950.34 1080.38,920.34 1080.38,894.34 1075.38,889.34 1066.38,889.34 1061.38,884.34 1061.38,866.34 1066.38,861.34 1075.38,861.34 1080.38,856.34 1080.38,837.34 1109.38,808.34 1109.38,763.34 1093.62,747.58 v1(1093.62,738.32)
DRAM_D46: U3.AE21 U10.C2 | length 557.6
  Top Layer w4.7: U10.C2@888.88,722.58 v1(904.64,706.82) ; v1(939.35,994.34) 939.35,1004.34 945.35,1010.34 U3.AE21@945.35,1019.39
  Signal Layer 1 w4.5: v1(904.64,706.82) 904.64,696.34 909.64,691.34 955.38,691.34 960.38,696.34 960.38,719.34 956.38,723.34 924.38,723.34 920.38,727.34 920.38,736.34 923.38,739.34 957.38,739.34 962.38,744.34 962.38,750.34 958.38,754.34 932.38,754.34 932.16,754.56 929.82,754.56 920.89,763.49 920.89,776.13 927.38,782.62 927.38,788.5 920.89,794.99 920.89,807.63 929.82,816.56 931.6,816.56 932.38,817.34 946.38,817.34 952.38,823.34 952.38,844.31 939.35,857.34 v1(939.35,994.34)
DRAM_D47: U3.AC21 U10.A7 | length 559.1
  Top Layer w4.7: U3.AC21@945.35,1082.38 v1(961.1,1066.63) ; v1(1030.62,801.31) U10.A7@1046.36,785.57
  Signal Layer 1 w4.5: v1(961.1,1066.63) 958.88,1066.63 953.88,1061.63 953.88,1048.34 958.88,1043.34 970.82,1043.34 975.82,1038.34 975.82,1024.88 980.82,1019.88 995.38,1019.88 1000.38,1014.88 1000.38,1007.34 992.38,999.34 992.38,988.91 994.1,987.19 994.1,985.84 1005.88,974.05 1005.88,969.59 1000.88,964.59 977.38,964.59 972.38,959.59 972.38,946.37 989.16,929.59 1019.93,929.59 1024.37,934.03 1033.67,934.03 1040.38,927.32 1040.38,918.34 1035.38,913.34 1009.38,913.34 1004.38,908.34 1004.38,872.34 1010.38,866.34 1010.38,842.34 1004.38,836.34 1004.38,822.34 1009.38,817.34 1041.38,817.34 1046.38,812.34 1046.38,790.34 1041.38,785.34 1035.62,785.34 1030.62,790.34 v1(1030.62,801.31)
DRAM_D48: U3.AC22 U9.D7 | length 513.6
  Top Layer w4.7: U3.AC22@976.84,1082.38 v1(992.59,1066.63)
  Signal Layer 2 w4.5: v1(936.14,706.82) 986.38,757.06 986.38,938.9 982.26,943.02 982.26,961.22 1039.34,1018.3 1039.34,1072.95 1030.41,1081.88 1007.84,1081.88 v1(992.59,1066.63)
  Bottom Layer w4.7: U9.D7@920.39,691.08 v1(936.14,706.82)
DRAM_D49: U3.AE22 U9.A7 | length 510.2
  Top Layer w4.7: U3.AE22@976.84,1019.39 976.84,982.88 v1(978.84,980.88)
  Signal Layer 2 w4.5: v1(936.14,801.31) 936.14,791.38 951.39,776.13 951.39,763.49 924.68,736.79 924.68,731.04 932.97,722.75 940.04,722.75 976.63,759.34 976.63,784.02 972.38,788.27 960.63,788.27 956.38,792.52 956.38,798.52 960.63,802.77 972.38,802.77 976.63,807.02 976.63,813.02 972.38,817.27 960.63,817.27 956.38,821.52 956.38,827.52 960.63,831.77 972.38,831.77 976.63,836.02 976.63,915.66 968.38,923.91 968.38,970.41 v1(978.84,980.88)
  Bottom Layer w4.7: U9.A7@920.39,785.57 v1(936.14,801.31)
DRAM_D50: U3.AE24 U9.A3 | length 516.6
  Top Layer w4.7: v1(1039.84,994.8) U3.AE24@1039.84,1019.39
  Signal Layer 2 w4.5: v1(1030.62,769.81) 1008.38,769.81 1003.38,774.81 1003.38,852.18 1007.63,856.43 1052.13,856.43 1056.38,860.68 1056.38,866.68 1052.13,870.93 1014.38,870.93 1009.38,875.93 1009.38,888.34 1014.38,893.34 1053.38,893.34 1058.38,898.34 1058.38,906.34 1053.38,911.34 1015.38,911.34 1010.38,916.34 1010.38,926.34 1015.38,931.34 1050.38,931.34 1055.38,936.34 1055.38,979.25 v1(1039.84,994.8)
  Bottom Layer w4.7: v1(1030.62,769.81) U9.A3@1046.37,785.57
DRAM_D51: U3.AC24 U9.C3 | length 511.4
  Top Layer w4.7: U3.AC24@1039.84,1082.38 1049.06,1082.38 1064.81,1066.63 1077.86,1066.63 1109.38,1035.11 1109.38,994.34 1106.38,991.34 v1(1106.38,965.34)
  Signal Layer 2 w4.5: v1(1030.62,738.32) 1046.65,754.34 1068.22,754.34 1077.38,763.5 1077.38,776.34 1087.1,786.06 1135.1,786.06 1142.38,793.34 1142.38,923.34 1121.38,944.34 1121.38,950.34 v1(1106.38,965.34)
  Bottom Layer w4.7: v1(1030.62,738.32) U9.C3@1046.37,722.58
DRAM_D52: U3.AB22 U9.B8 | length 518.5
  Top Layer w4.7: U3.AB22@976.84,1113.88 v1(992.59,1098.13)
  Signal Layer 2 w4.5: v1(873.14,769.81) 884.38,769.81 889.38,774.81 889.38,812.34 910.38,833.34 910.38,860.34 924.1,874.06 924.1,883.17 931.38,890.45 931.38,898.88 924.1,906.16 924.1,912.17 930.38,918.45 930.38,928.88 924.1,935.16 924.1,941.17 931.13,948.2 931.13,957.14 928.35,959.92 924.1,964.16 924.1,1016.06 951.38,1043.34 972.34,1043.34 977.34,1048.34 977.34,1109.37 982.34,1114.37 1001.38,1114.37 1006.38,1109.37 1006.38,1103.13 1001.38,1098.13 v1(992.59,1098.13)
  Bottom Layer w4.7: v1(873.14,769.81) U9.B8@888.89,754.07
DRAM_D53: U3.AC23 U9.C8 | length 510.4
  Top Layer w4.7: U3.AC23@1008.34,1082.38 v1(1024.09,1066.63)
  Signal Layer 2 w4.5: v1(904.64,738.32) 920.38,754.06 920.38,840.34 932.38,852.34 957.38,852.34 962.38,857.34 962.38,886.26 958.13,890.5 950.13,890.5 945.88,894.75 945.88,979.3 954.6,988.02 954.6,1000.66 950.88,1004.38 950.88,1027.34 955.88,1032.34 968.38,1032.34 983.38,1017.34 1008.38,1017.34 1024.09,1033.05 v1(1024.09,1066.63)
  Bottom Layer w4.7: U9.C8@888.89,722.58 v1(904.64,738.32)
DRAM_D54: U3.AD25 U9.A2 | length 510.9
  Top Layer w4.7: U3.AD25@1071.33,1050.88 1093.38,1028.84 v1(1093.38,1004.34)
  Signal Layer 2 w4.5: v1(1062.12,801.31) 1062.38,801.57 1067.31,801.57 1072.31,806.57 1072.31,807.34 1077.31,812.34 1083.08,812.34 1087.3,816.56 1099.93,816.56 1104.15,812.34 1114.58,812.34 1126.38,824.14 1126.38,841.85 1122.13,846.09 1093.63,846.09 1089.38,850.34 1089.38,856.35 1093.63,860.59 1122.13,860.59 1126.38,864.84 1126.38,870.85 1122.13,875.09 1093.63,875.09 1089.38,879.34 1089.38,885.35 1093.63,889.59 1122.13,889.59 1126.38,893.84 1126.38,915.59 1090.63,951.34 1090.63,982.34 1095.63,987.34 1107.81,987.34 1112.38,991.91 1112.38,999.34 1107.38,1004.34 v1(1093.38,1004.34)
  Bottom Layer w4.7: v1(1062.12,801.31) U9.A2@1077.87,785.57
DRAM_D55: U3.AC25 U9.C2 | length 515.5
  Top Layer w4.7: U3.AC25@1071.33,1082.38 1085.34,1082.38 1095.38,1072.34 1095.38,1063.34 1097.68,1061.04 1097.68,1060.73 1121.34,1037.07 1121.34,1002.93 1125.38,998.89 v1(1125.38,983.34)
  Signal Layer 2 w4.5: v1(1062.12,706.82) 1062.12,707.08 1078.37,723.33 1078.37,745.33 1087.38,754.34 1135.38,754.34 1156.38,775.34 1156.38,964.34 1137.38,983.34 v1(1125.38,983.34)
  Bottom Layer w4.7: v1(1062.12,706.82) U9.C2@1077.87,722.58
DRAM_D56: U3.AB25 U9.E3 | length 1011.3
  Top Layer w4.7: U3.AB25@1071.33,1113.88 1095.84,1113.88 1106.38,1103.34 1106.38,1064.34 1130.33,1040.39 1130.33,1008.89 1142.83,996.39 1142.83,981.39 1152.83,971.39 1172.83,971.39 1180.33,963.89 1180.33,921.39 1175.33,916.39 1142.38,916.39 1137.38,921.39 v1(1137.38,951.34)
  Signal Layer 1 w4.5: v1(1062.12,675.32) 1062.12,673.34 1057.3,668.52 1050.23,668.52 1045.87,672.88 1045.87,685.38 1052.06,691.57 1098.94,691.57 1106.17,684.34 1111.38,684.34 1117.61,690.57 1131.43,690.57 1137.66,684.34 1144.38,684.34 1149.38,689.34 1149.38,709.34 1144.38,714.34 1140.38,714.34 1135.38,719.34 1135.38,727.02 1141.7,733.34 1144.38,733.34 1149.38,738.34 1149.38,819.79 1143.33,825.84 1125.99,825.84 1121.38,830.45 1121.38,835.31 1125.63,839.56 1144.6,839.56 1148.36,843.32 1148.36,848.36 1144.66,852.06 1125.66,852.06 1121.38,856.34 1121.38,862.34 1125.38,866.34 1143.38,866.34 1147.38,870.34 1147.38,876.34 1143.38,880.34 1125.38,880.34 1121.38,884.34 1121.38,891.34 1125.38,895.34 1144.36,895.34 1148.36,899.34 1148.36,906.34 1144.36,910.34 1128.19,910.34 1124.38,914.15 1124.38,919.53 1128.19,923.34 1144.38,923.34 1148.38,927.34 1148.38,932.34 1144.38,936.34 1126.38,936.34 1120.06,942.66 1120.06,956.02 1124.38,960.34 1128.38,960.34 v1(1137.38,951.34)
  Bottom Layer w4.7: U9.E3@1046.37,659.59 v1(1062.12,675.32)
DRAM_D57: U3.AA21 U9.F8 | length 1016.3
  Top Layer w4.7: U3.AA21@945.35,1145.37 v1(961.1,1129.62)
  Signal Layer 1 w4.5: v1(904.64,643.83) 904.64,650.69 913.29,659.34 944.38,659.34 951.86,666.82 ; 951.91,666.82 954.43,669.34 1000.38,669.34 1008.88,677.84 1008.88,687.43 1012.79,691.34 1038.38,691.34 1046.38,699.34 1046.38,714.34 1054.38,722.34 1100.38,722.34 1108.87,730.83 1108.87,743.64 ; v1(961.1,1129.62) 964.81,1133.34 973.38,1133.34 977.34,1129.38 977.34,1119.42 983.38,1113.38 998.91,1113.38 1008.38,1103.91 1008.38,1092.34 1008.84,1091.88 1008.84,1091.81 1017.77,1082.88 1017.84,1082.88 1018.84,1081.88 1030.41,1081.88 1039.34,1072.95 1039.34,1071.54 1039.38,1071.49 1039.38,1061.77 1039.34,1061.73 1039.34,1060.31 1034.38,1055.35 1034.38,1018.34 1039.38,1013.34 1048.38,1013.34 1053.38,1018.34 1053.38,1026.34 1058.38,1031.34 1065.38,1031.34 1070.38,1026.34 1070.38,1015.91 1063.81,1009.34 1061.38,1009.34 1056.38,1004.34 1056.38,1001.41 1056.08,1001.12 1056.08,988.48 1056.38,988.18 1056.38,987.77 1063.38,980.77 1063.38,974.91 1060.13,971.66 1060.13,959.02 1063.38,955.77 1063.38,955.09 1068.38,950.09 1081.7,950.09 1087.95,956.34 1093.81,956.34 1100.06,950.09 1106.38,950.09 1110.38,946.09 1110.38,930.18 1107.38,927.18 1095.63,927.18 1092.88,924.43 1092.88,917.42 1096.63,913.68 1106.13,913.68 1109.88,909.93 1109.88,909.82 1111.38,908.32 1111.38,902.42 1108.13,899.18 1096.63,899.18 1092.88,895.43 1092.88,888.42 1096.63,884.68 1107.13,884.68 1111.38,880.43 1111.38,874.42 1107.13,870.18 1096.63,870.18 1092.88,866.43 1092.88,859.42 1096.63,855.68 1107.13,855.68 1111.38,851.43 1111.38,845.42 1107.13,841.18 1107.13,823.18 1112.97,817.34 1134.36,817.34 1140.36,811.34 1140.36,763.49 1131.43,754.56 1119.78,754.56 1108.87,743.65
  Bottom Layer w4.7: U9.F8@888.89,628.09 v1(904.64,643.83)
DRAM_D58: U3.Y25 U9.G2 | length 1015.6
  Top Layer w4.7: U3.Y25@1071.33,1176.87 1071.85,1176.87 v1(1089.38,1159.34)
  Signal Layer 1 w4.5: v1(1089.38,1159.34) 1125.38,1123.34 1125.38,1100.34 1196.88,1028.84 1196.88,862.41 1227.33,831.96 1227.33,808.39 1222.83,803.89 1222.83,740.86 1252.94,710.75 1252.94,626.17 v1(1237.6,610.84)
  Signal Layer 2 w4.5: v1(1093.62,580.84) 1109.11,565.34 1148.38,565.34 1161.63,578.59 1187.13,578.59 1191.38,582.83 1191.38,588.84 1187.13,593.09 1161.63,593.09 1157.38,597.33 1157.38,603.34 1161.63,607.59 1182.13,607.59 1186.38,611.83 1186.38,617.84 1182.13,622.09 1161.63,622.09 1157.38,626.33 1157.38,637.34 1166.38,646.34 1187.38,646.34 1222.88,610.84 v1(1237.6,610.84)
  Bottom Layer w4.7: U9.G2@1077.87,596.59 v1(1093.62,580.84)
DRAM_D59: U3.Y22 U9.H8 | length 1020.5
  Top Layer w4.7: U3.Y22@976.84,1176.87 v1(992.59,1161.12)
  Bottom Layer w4.7: 826.3,587.2 826.3,562.42 840.38,548.34 872.14,548.34 U9.H8@888.89,565.1 ; 826.3,605.97 826.3,618.69 ; 826.3,637.47 826.3,650.19 ; 826.3,668.96 826.3,681.68 ; 826.3,744.68 826.3,732.17 826.05,731.92 826.05,700.22 826.33,699.94 826.33,681.72 ; 826.3,763.45 826.3,776.17 ; 826.3,794.95 826.3,807.67 ; 826.33,587.23 826.33,605.94 ; 826.33,618.72 826.33,637.44 ; 826.33,650.22 826.33,668.93 ; 826.33,744.71 826.33,763.42 ; 826.33,776.2 826.33,794.92 ; 826.33,807.7 826.33,873.29 846.38,893.34 894.38,893.34 921.38,920.34 921.38,999.26 917.07,1003.56 898.69,1003.56 894.38,1007.87 894.38,1013.95 898.69,1018.26 918.38,1018.26 951.4,1051.28 1030.45,1051.28 1039.44,1060.27 1039.44,1072.99 1030.09,1082.34 954.38,1082.34 944.95,1091.77 944.95,1135.98 954.74,1145.77 977.24,1145.77 v1(992.59,1161.12)
DRAM_D60: U3.AB23 U9.F7 | length 1014.9
  Top Layer w4.7: U3.AB23@1008.34,1113.88 v1(1024.09,1098.13)
  Signal Layer 1 w4.5: v1(936.14,643.83) 947.38,643.83 952.38,648.83 952.38,650.15 961.31,659.08 980.19,659.08 982.88,656.39 982.88,644.34 987.88,639.34 1004.57,639.34 1010.97,645.75 1010.97,652.03 1018.02,659.08 1036.94,659.08 1043.68,652.34 1049.06,652.34 1055.8,659.08 1068.44,659.08 1075.18,652.34 1080.56,652.34 1087.3,659.08 1140.12,659.08 1158.38,677.34 1158.38,960.34 1154.38,964.34 1145.95,964.34 1140.38,969.91 1140.38,974.34 1144.38,978.34 1154.38,978.34 1158.38,982.34 1158.38,993.34 1154.38,997.34 1145.38,997.34 1141.38,993.34 1136.95,993.34 1132.38,997.91 1132.38,1006.34 1128.38,1010.34 1116.38,1010.34 1112.38,1014.34 1112.38,1021.34 1116.38,1025.34 1126.38,1025.34 1130.38,1029.34 1130.38,1037.34 1126.38,1041.34 1104.19,1041.34 1088.78,1025.94 1082.78,1025.94 1078.53,1030.19 1078.53,1036.2 1097.67,1055.34 1097.67,1061.05 1093.63,1065.09 1087.92,1065.09 1064.38,1041.55 1057.31,1041.55 1049.64,1049.23 1049.64,1056.3 1053.52,1060.19 1061.38,1060.19 1066.38,1065.19 1066.38,1078.34 1061.77,1082.95 1047.77,1082.95 1032.59,1098.13 v1(1024.09,1098.13)
  Bottom Layer w4.7: U9.F7@920.39,628.09 v1(936.14,643.83)
DRAM_D61: U3.AA23 U9.H7 | length 1012.4
  Top Layer w4.7: U3.AA23@1008.34,1145.37 v1(1024.09,1129.62)
  Signal Layer 1 w4.5: v1(936.14,580.84) 936.14,594.1 952.62,610.58 1034.14,610.58 1037.38,607.34 1037.38,599.48 1046.38,590.48 1046.38,572.34 1053.13,565.59 1067.44,565.59 1078.37,554.66 1078.37,543.02 1087.3,534.09 1099.93,534.09 1108.87,543.02 1108.87,588.34 1116.61,596.09 1134.13,596.09 1159.38,621.34 1159.38,643.34 1178.38,662.34 1178.38,1023.28 1072.04,1129.62 v1(1024.09,1129.62)
  Bottom Layer w4.7: U9.H7@920.39,565.1 v1(936.14,580.84)
DRAM_D62: U3.Y23 U9.F2 | length 1013.9
  Top Layer w4.7: U3.Y23@1008.34,1176.87 v1(1024.09,1161.12)
  Signal Layer 1 w4.5: v1(1024.09,1161.12) 1024.09,1150.58 1032.03,1142.64 1071.05,1142.64 1188.38,1025.31 1188.38,658.39 1167.88,637.89 1167.88,621.84 1177.38,612.34 1207.61,612.34 v1(1237.6,642.33)
  Signal Layer 2 w4.5: v1(1062.12,612.33) 1071.13,612.33 1087.38,596.09 1133.43,596.09 1144.03,606.69 1144.03,653.64 1151.73,661.34 1201.59,661.34 1220.6,642.33 v1(1237.6,642.33)
  Bottom Layer w4.7: v1(1062.12,612.33) U9.F2@1077.87,628.09